# Altium PCB MotorDriver.PcbDoc
Units mil, origin at the board's own origin, x right, y up, seen from the top; angles counter-clockwise.
Board outline 5390 x 3535 mil, 2 copper layers (Top Layer, Bottom Layer); 60 components, 42 nets, 198 pads, 54 vias.
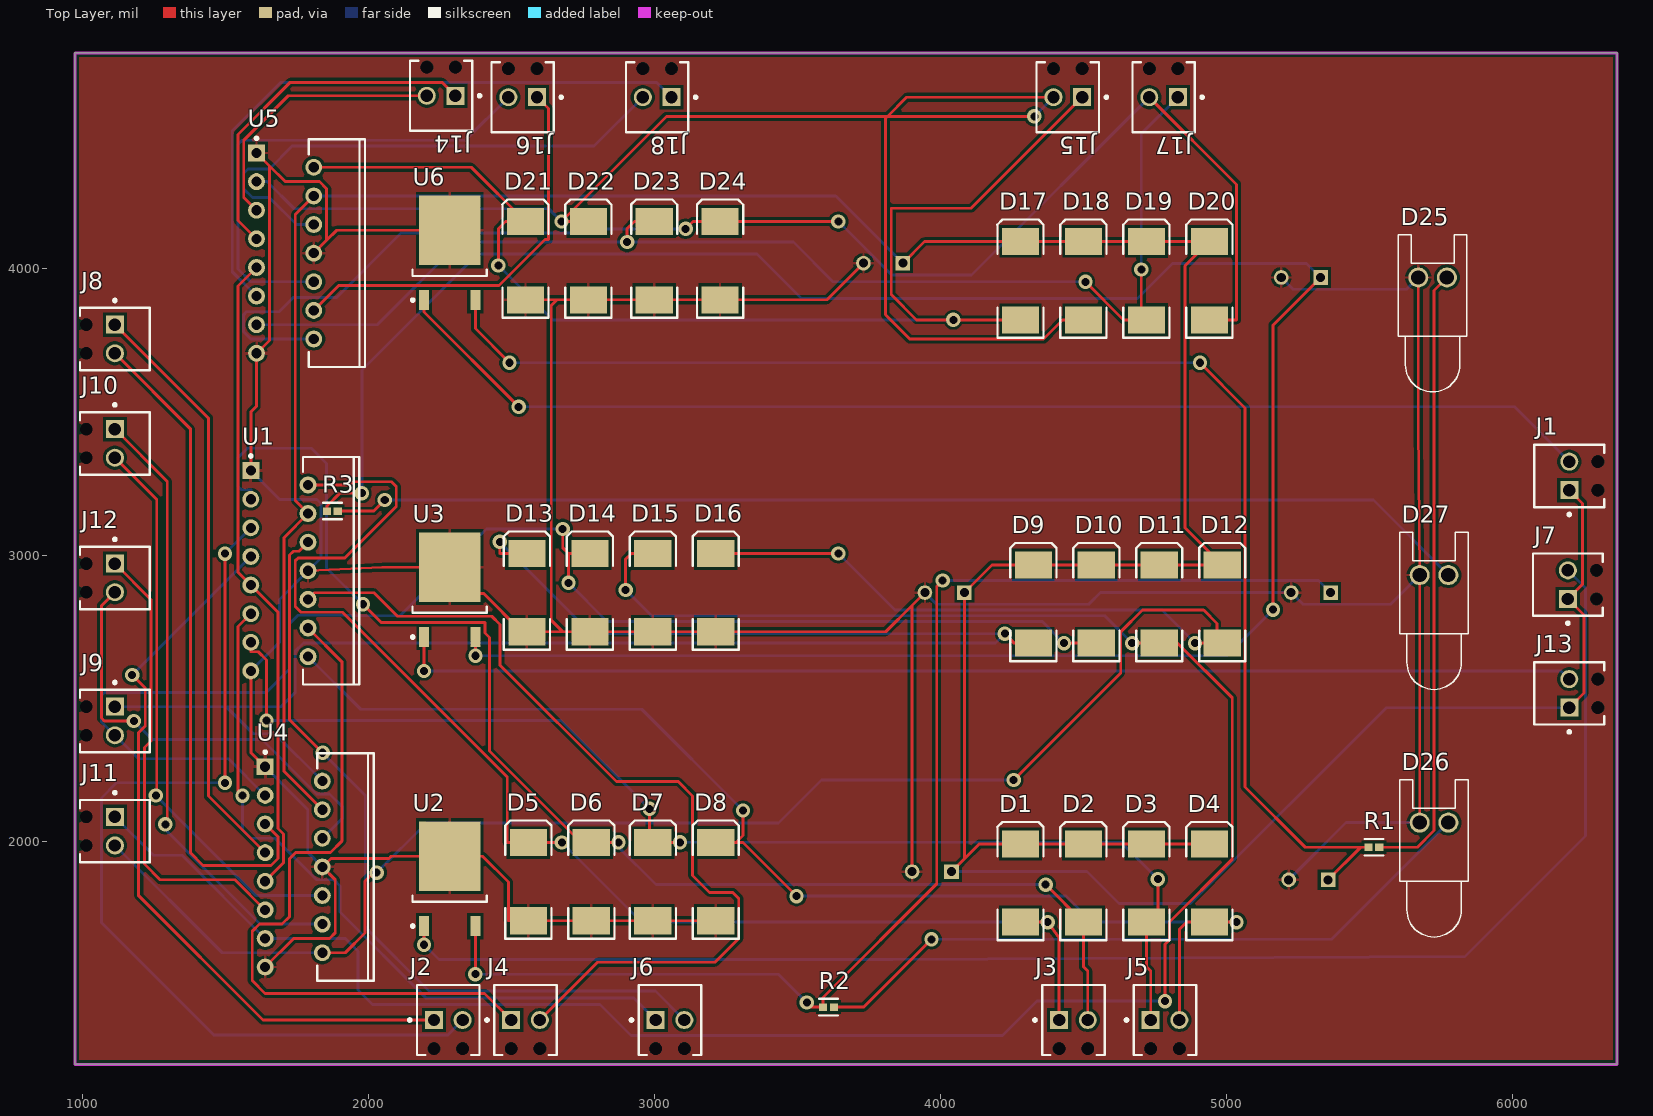
[diagram p0: Top Layer view]
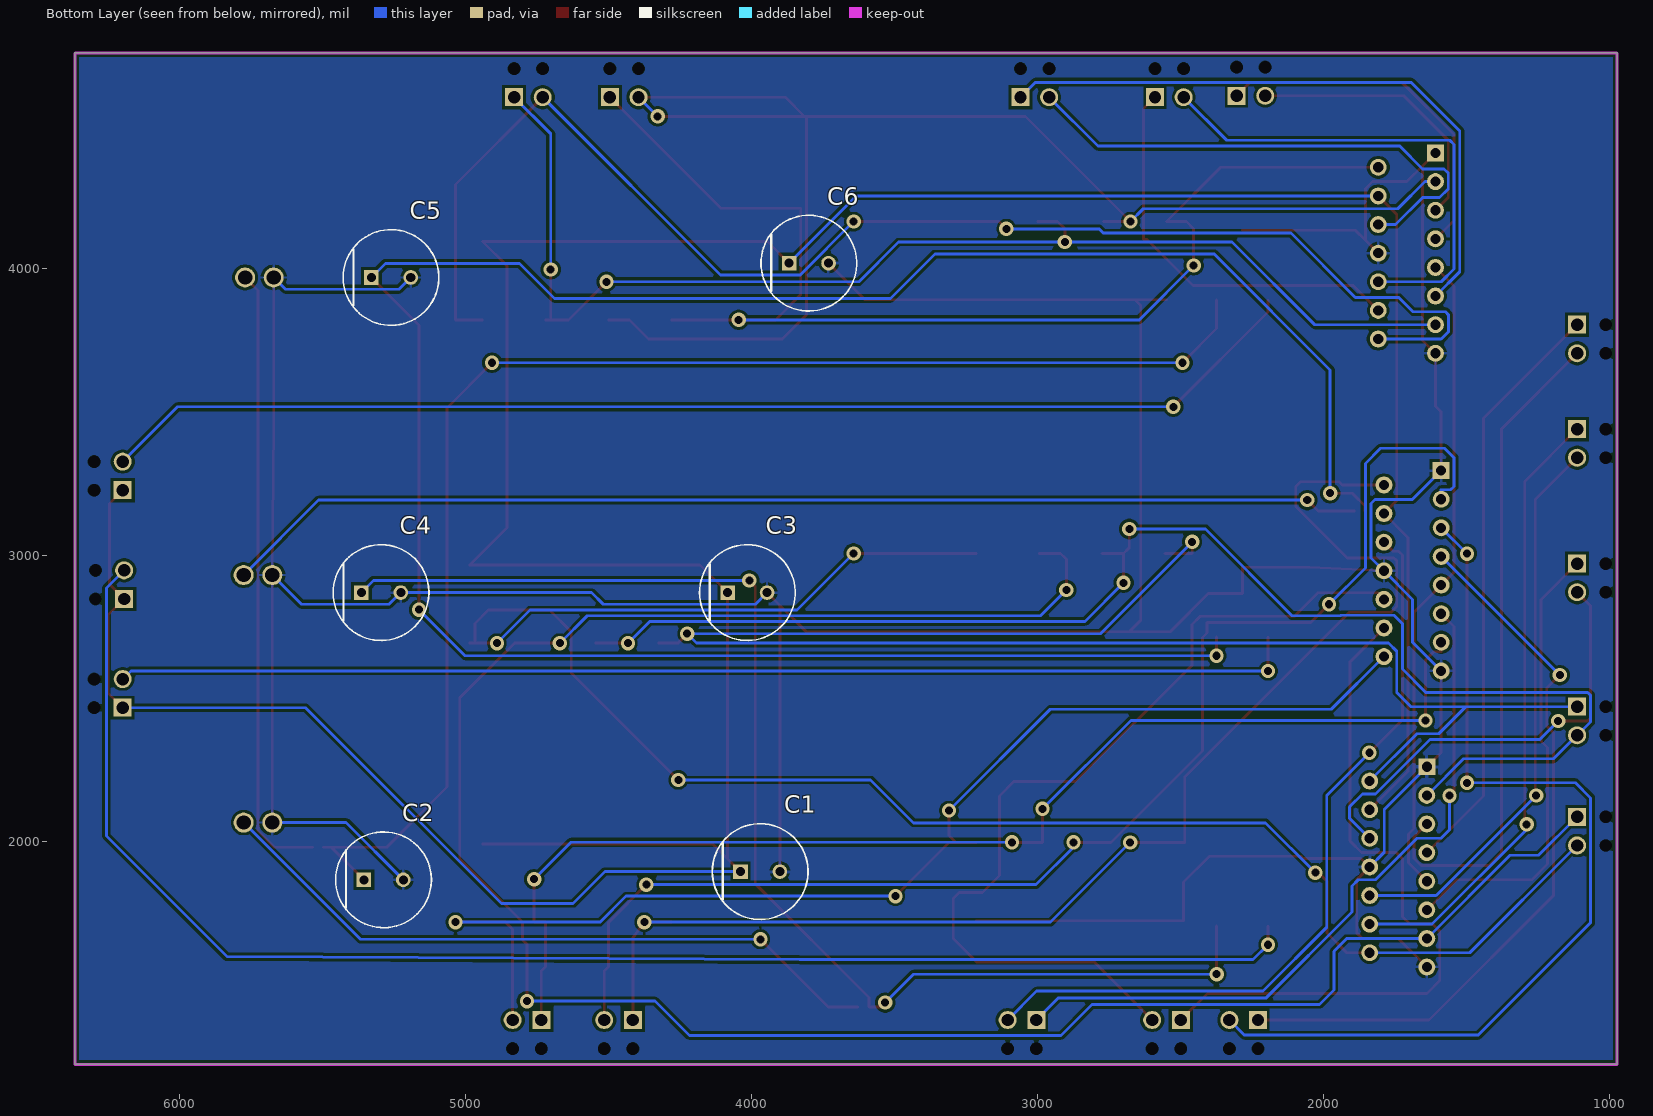
[diagram p1: Bottom Layer view, seen from below]
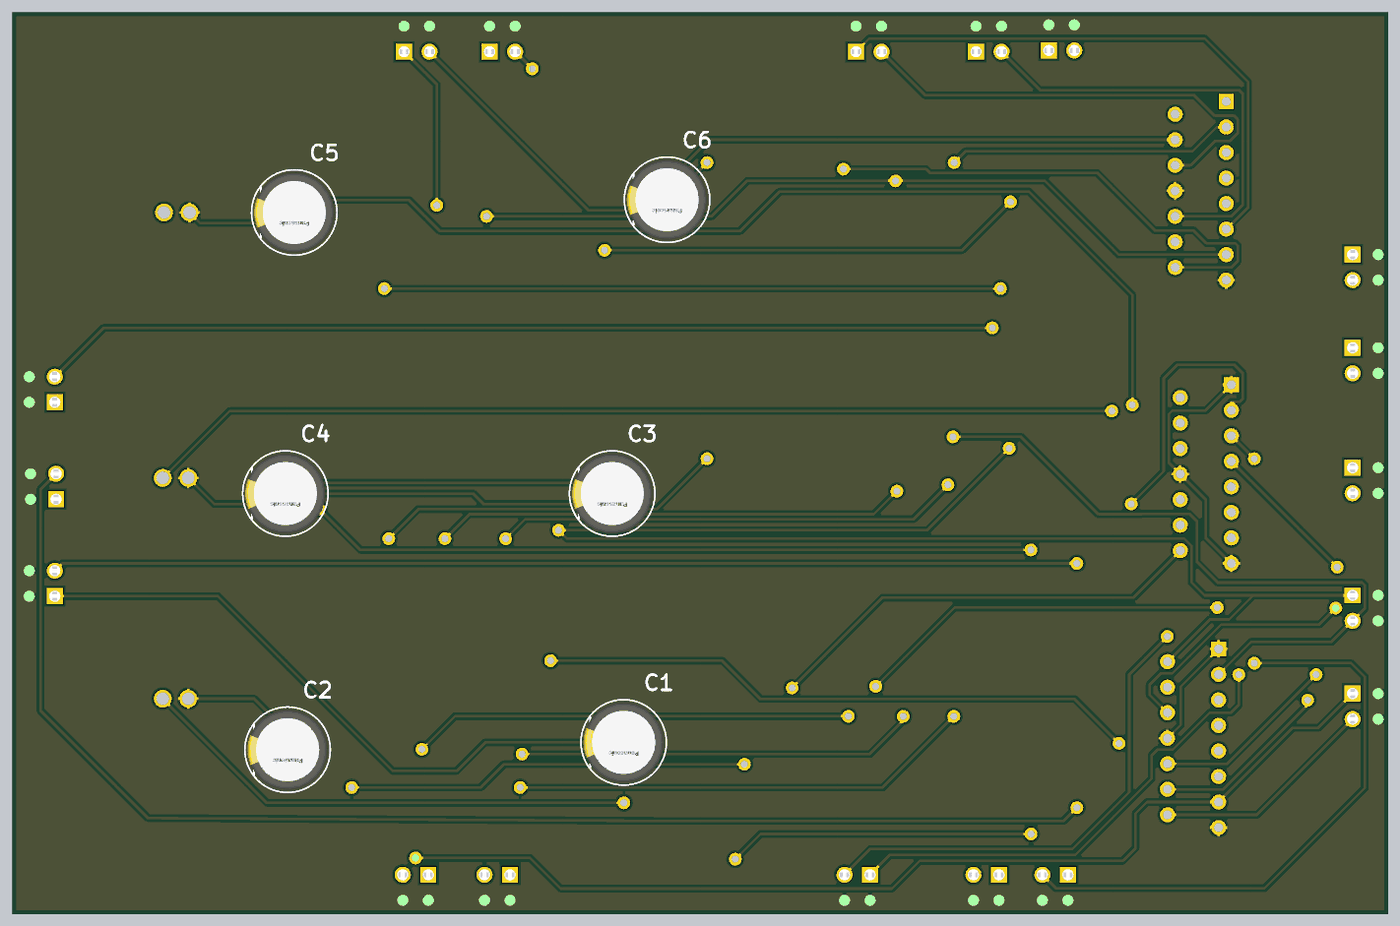
[diagram p2: 3D render of the assembled board from below, using the file's embedded part models]

## Layer stack, top to bottom
Top Solder: solder mask 0.4, Solder Resist, Dk 3.5
Top Layer: signal copper 1.4
Dielectric 1: dielectric 12.6, FR-4, Dk 4.8
Bottom Layer: signal copper 1.4
Bottom Solder: solder mask 0.4, Solder Resist, Dk 3.5

## Board outline
975,1220 975,4755 6365,4755 6365,1220

## Design rules (kind name [scope] priority, off if disabled: settings)
Clearance [All] p1: gap=10 ignorepadtopadclearanceinfootprint=FALSE except(5: Track-Track Track-SMDPad SMDPad-SMDPad; 7: Track-Via)
HoleSize [All] p1: absolutevalues=TRUE maxlimit=150 minlimit=10 maxpercent=80.000 minpercent=20.000
MinimumAnnularRing [All] p1: minimumring=7
MinimumSolderMaskSliver [All] p1: minsoldermaskwidth=1
PolygonConnect [All] p1: connectstyle=Relief reliefconductorwidth=10 reliefentries=4 polygonreliefangle="90 Angle" airgapwidth=10
RoutingVias [All] p1: holewidth=10 width=22 viastyle="Through Hole" minholewidth=10 minwidth=22 maxholewidth=100 maxwidth=150
SilkToSolderMaskClearance [IsPad] p1: minsilkscreentomaskgap=5 clearancetoexposedcopper=TRUE
SolderMaskExpansion [All] p1: expansion=4 istentingtop=FALSE
Width [All] p1: maxlimit=150 minlimit=8 preferedwidth=10
27 further rules are at their usual default settings.

## Components (designator, comment, footprint, x,y, rotation, side; value= is the part's Value field where it differs from the comment)
C1 "EEU-FC1V221L" FP-EEU-FC1V221L-MFG 3969.84,1893.74 r180 bottom value=220uF
C2 "EEU-FC1V221L" FP-EEU-FC1V221L-MFG 5286.1,1865 r180 bottom value=220uF
C3 "EEU-FC1V221L" FP-EEU-FC1V221L-MFG 4014.84,2868.74 r180 bottom value=220uF
C4 "EEU-FC1V221L" FP-EEU-FC1V221L-MFG 5294.84,2868.74 r180 bottom value=220uF
C5 "EEU-FC1V221L" FP-EEU-FC1V221L-MFG 5260,3970 r180 bottom value=220uF
C6 "EEU-FC1V221L" FP-EEU-FC1V221L-MFG 3800,4020 r180 bottom value=220uF
D1 "Diode" SMC 4279.84,1853.74 r90 top
D2 "Diode" SMC 4499.84,1853.74 r90 top
D3 "Diode" SMC 4719.84,1853.74 r90 top
D4 "Diode" SMC 4939.84,1853.74 r90 top
D5 "Diode" SMC 2559.84,1858.74 r90 top
D6 "Diode" SMC 2779.84,1858.74 r90 top
D7 "Diode" SMC 2994.84,1858.74 r90 top
D8 "Diode" SMC 3214.84,1858.74 r90 top
D9 "Diode" SMC 4324.84,2828.74 r90 top
D10 "Diode" SMC 4544.84,2828.74 r90 top
D11 "Diode" SMC 4764.84,2828.74 r90 top
D12 "Diode" SMC 4984.84,2828.74 r90 top
D13 "Diode" SMC 2554.84,2868.74 r90 top
D14 "Diode" SMC 2774.84,2868.74 r90 top
D15 "Diode" SMC 2994.84,2868.74 r90 top
D16 "Diode" SMC 3214.84,2868.74 r90 top
D17 "Diode" SMC 4279.84,3958.74 r90 top
D18 "Diode" SMC 4499.84,3958.74 r90 top
D19 "Diode" SMC 4719.84,3958.74 r90 top
D20 "Diode" SMC 4939.84,3958.74 r90 top
D21 "Diode" SMC 2549.84,4028.74 r90 top
D22 "Diode" SMC 2769.84,4028.74 r90 top
D23 "Diode" SMC 2999.84,4028.74 r90 top
D24 "Diode" SMC 3229.84,4028.74 r90 top
D25 "LED0" LED-0 5720,3970 r0 top
D26 "LED0" LED-0 5725,2065 r0 top
D27 "LED0" LED-0 5725,2930 r0 top
J1 "1725656" PHOE-1725656-2 6197.77,3276.47 r90 top
J2 "1725656" PHOE-1725656-2 2280,1375 r0 top
J3 "1725656" PHOE-1725656-2 4465,1375 r0 top
J4 "1725656" PHOE-1725656-2 2550,1375 r0 top
J5 "1725656" PHOE-1725656-2 4785,1375 r0 top
J6 "1725656" PHOE-1725656-2 3055,1375 r0 top
J7 "1725656" PHOE-1725656-2 6192.77,2896.47 r90 top
J8 "1725656" PHOE-1725656-2 1115,3755 r270 top
J9 "1725656" PHOE-1725656-2 1115,2420 r270 top
J10 "1725656" PHOE-1725656-2 1115,3390 r270 top
J11 "1725656" PHOE-1725656-2 1115,2035 r270 top
J12 "1725656" PHOE-1725656-2 1115,2920 r270 top
J13 "1725656" PHOE-1725656-2 6197.77,2516.47 r90 top
J14 "1725656" PHOE-1725656-2 2255,4605 r180 top
J15 "1725656" PHOE-1725656-2 4445,4600 r180 top
J16 "1725656" PHOE-1725656-2 2540,4600 r180 top
J17 "1725656" PHOE-1725656-2 4780,4600 r180 top
J18 "1725656" PHOE-1725656-2 3010,4600 r180 top
R1 "RC1005F102CS" FP-RC1005-IPC_A 5514.84,1978.74 r0 top
R2 "RC1005F102CS" FP-RC1005-IPC_A 3608.84,1420 r0 top
R3 "RC1005F102CS" FP-RC1005-IPC_A 1874.84,3153.74 r0 top
U1 "L298N" STM-FM-15 1690,2945 r0 top
U2 "L78M05CDT-TR" TO-252_L 2284.84,1868.74 r90 top
U3 "L78M05CDT-TR" TO-252_L 2284.84,2878.74 r90 top
U4 "L298N" STM-FM-15 1740,1910 r0 top
U5 "L298N" STM-FM-15 1710,4055 r0 top
U6 "L78M05CDT-TR" TO-252_L 2285,4056.26 r90 top

## Footprints (in the part's own frame and the unit in brackets; to place one, negate y for a bottom-side part, rotate by r counter-clockwise, add the part's x,y. Pads: shape width x height; smd on the part's side, far side on the other; paste and mask are expansions set on the pad)
FP-EEU-FC1V221L-MFG [mm]
  rect 1.3x1.3 hole 0.8 paste-2539.97 mask+0: 1(-1.75,0)
  round 1.3 hole 0.8 paste-2539.97 mask+0: 2(1.75,0)
  silkscreen extent -4.25,-4.25 4.25,4.25, body extent -4,-4 4,4, height 16.5
FP-RC1005-IPC_A [mil]
  rect 28.16x26.48 smd paste+0 mask+0: 1(-18.84,0) 2(18.84,0)
  silkscreen extent -33,-29 33,29, body extent -41,-21 41,21, height 10
LED-0 [mil] "LED; 2 Leads"
  round 70 hole 50: 1(50,0) 2(-50,0)
  silkscreen extent -120,-400 120,150
PHOE-1725656-2 [mm] "Connector, 2-Leads, Body 6.2x5.4mm, Pitch 2.54mm"
  rect 1.6x1.6 hole 1.1: 1(-1.27,0)
  round 1.6 hole 1.1: 2(1.27,0)
  round 0 hole 1.1 unplated: MH1(-1.27,-2.54) MH2(1.27,-2.54)
  silkscreen extent -3.54,-3.1 2.77,3.1, body extent -2.77,-3.1 2.77,3.1, height 9
SMC [mm] "DO-214-AB/SMC; 2 C-Bend Leads; Body 7.9 x 5.9 mm, inc. leads (LxW)"
  rect 2.4x3.3 smd: 1(-3.475,0) 2(3.475,0)
  silkscreen extent -5.07,-2.05 5.42,2.05
STM-FM-15 [mm] "FM, 15-Leads, Body 20.2x5mm, Pitch 1.27mm"
  rect 1.5x1.5 hole 0.9: 1(-2.54,8.89)
  round 1.5 hole 0.9: 2(2.54,7.62) 3(-2.54,6.35) 4(2.54,5.08) 5(-2.54,3.81) 6(2.54,2.54) 7(-2.54,1.27) 8(2.54,0) 9(-2.54,-1.27) 10(2.54,-2.54) 11(-2.54,-3.81) 12(2.54,-5.08) 13(-2.54,-6.35) 14(2.54,-7.62) 15(-2.54,-8.89)
  silkscreen extent -2.66,-10.1 7.09,10.31, body extent -2.8,-10.1 7.09,10.1, height 21
TO-252_L [mm] "D-PAK, 4-Leads, Body 6.1x6.5mm, Pitch 2.28mm, Lead Span 9.7mm, IPC High Density"
  rect 1.8x0.9 smd: 1(-4.2,2.28) 3(-4.2,-2.28)
  rect 6.2x5.45 smd: 4(2,0)
  silkscreen extent -4.32,-3.3 -1.5,3.4, body extent -2.05,-3.3 4.15,3.3, height 2.4

## Part data
C1 C2 C3 C4 C5 C6: library part CMP-05427-000010-1, "CAP ALUM 220UF 20% 35V RADIAL", Capacitance=220uF, Leakage Current=77uA, Manufacturer="Panasonic Electronic Components", Package=0, Ripple Current=730mA, Temperature="-55°C to +105°C", Temperature Range High=+105°C, Temperature Range Low=-55°C, Tolerance=20%, Voltage Rating=35V, Automotive=Yes, Automotive Grade="Grade 2", Category=Cap, ComponentLink2Description=Datasheet, ComponentLink2URL=https://industrial.panasonic.com/cdbs/www-data/pdf/RDF0000/ABA0000C1209.pdf, Device Class L1="Passive Components", Device Class L2=Capacitors, Device Class L3="Aluminum Electrolytic Capacitors", Digikey Description="CAP ALUM 220UF 20% 35V RADIAL", Dissipation Factor=12%, Esr=0.085Ω, Height=16.5mm, Lead Free=Yes, Life=2000Hours, Manufacturer Part Number=EEU-FC1V221L, Material=Aluminum, Mouser Description="Capacitor; Aluminum Electrolytic; Fc Radial Elec Cap 220uF 35V", Octopart=https://octopart.com/eeu-fc1v221l-panasonic-39478519, RoHS=TRUE
D1 D2 D3 D4 D5 D6 D7 D8 D9 D10 D11 D12 D13 D14 D15 D16 D17 D18 D19 D20 D21 D22 D23 D24: "Default Diode", Code_JEDEC=DO-214-AB, LatestRevisionDate=17-Jul-2002, LatestRevisionNote="Re-released for DXP Platform.", PackageDescription="DO-214-AB/SMC; 2 C-Bend Leads; Body 7.9 x 5.9 mm, inc. leads (LxW)", PackageReference=SMC, PackageVersion=Sep-1996, Published=8-Jun-2000, Publisher="Altium Limited"
D25 D26 D27: "Typical INFRARED GaAs LED", LatestRevisionDate=08-Jul-2005, LatestRevisionNote="Mech Layer 1 removed.", PackageDescription="LED; 2 Leads", PackageReference=LED-0, Published=8-Jun-2000, Publisher="Altium Limited"
J1 J2 J3 J4 J5 J6 J7 J8 J9 J10 J11 J12 J13 J14 J15 J16 J17 J18: library part CMP-2000-05299-1, "Male Header, Pitch 2.54 mm, 1 x 2 Position, Height 9 mm, Tail Length 3.5 mm", Colour=Green, Manufacturer="Phoenix Contact", Content=250pc(s), Datasheet URL=http://datasheet.octopart.com/1725656-Phoenix-Contact-datasheet-5302866.pdf, Datasheet Version=Apr-08, Industrial packaging=Yes, Manufacturer part No.=1725656, Manufacturer URL=http://www.phoenixcontact.com/, Number of contacts=2, Pitch=2.54mm, Type=MPT0,5/2-2,54
R1 R2 R3: library part CMP-13261-004451-1, "Res Thick Film 0402 1kΩ 1% 0.063W ±100ppm/°C Molded SMD T/R", Case Code (Imperial)=0402, Case Code (Metric)=1005, Max Operating Temperature=155°C, Max Power Dissipation=63mW, Min Operating Temperature=-55°C, Resistance=1kR, Temperature Coefficient=100ppm/°C, Tolerance=1%, Voltage Rating (DC)=50V, Case/Package=0402, Composition="Thick Film", Contact Plating=Tin, Depth=0.5mm, Features="Moisture Resistant", Height=0.016inch, Lead Free="Lead Free", Length=1mm, Military Standard=Not, Number of Terminations=2, Packaging="Tape and Reel", Radiation Hardening=No, Width=0.02inch
U1 U4 U5: library part CMP-2000-06526-1, "Dual Full-Bridge Driver, 4.8 to 46 V, -40 to 150 degC, 15-Pin FM (MW 15L), RoHS, Tube", Driver Case Style=Multiwatt, Manufacturer=STMicroelectronics, Operating Temperature Max=130°C, Operating Temperature Min=-25°C, Output Current=2A, Output Voltage=46V, Package Description="15-Pin Flange Mount, Body 5 x 19.6 mm, Pitch 1.27 mm", Package Reference=FM-15, PartNumber=L298, Supply Voltage Max=7V, Supply Voltage Min=4.5V, Automotive Qualification Standard=-, Datasheet URL=https://datasheet.ciiva.com/15109/getdatasheetpartid-50682-15109332.pdf, Datasheet Version=01/2000, Manufacturer URL=http://www.st.com/, Motor Type=FullBridge, Mounting Technology=ThroughHole, MSL=-, No. of Outputs=4Outputs, No. of Pins=15Pins, Packaging=Each, Product Range=-, SVHC=NoSVHC(17-Dec-2015)
U2 U3 U6: library part CMP-0244-00178-1, "Positive Voltage Regulator, 5V, 3-Pin DPAK, Tape and Reel", ComponentLink1Description="Manufacturer URL", ComponentLink1URL=http://www.st.com, ComponentLink2Description=Datasheet, ComponentLink2URL=http://www.st.com/internet/com/TECHNICAL_RESOURCES/TECHNICAL_LITERATURE/DATASHEET/CD00000447.pdf, DatasheetVersion=1/11/2010, PackageDescription="3-Pin Transistor Outline Package 2.28 mm Pitch, 9.7 mm Lead Span (DPAK)", PackageReference=TO-252, PackageVersion=2011

## Via types
v1: diameter 50, hole 28, Top Layer to Bottom Layer, 54 vias

## Nets (pads, with @x,y where several pads share a name; then routed paths per layer and width w, separated by ;. In a path a pad name is that pad's centre, name@x,y a point inside that pad or via, vN(x,y) a via of type N, cw(c..) or ccw(c..) an arc to the next point about the centre after c; other vN are vias at no path point)
+5: U1.9 U4.9 U5.9 | length 2264.7
  Top Layer w10: U5.9 1545,3940 1545,2940 U1.9 1685,2800 1685,2044.06 1704.53,2024.53 1704.53,1924.53 U4.9
GND: C1.2 C2.2 C3.2 C4.2 C5.2 C6.2 D5.1 D6.1 D7.1 D8.1 D13.1 D14.1 D15.1 D16.1 D21.1 D22.1 D23.1 D24.1 D25.2 D26.2 D27.2 U1.1 U1.8 U1.15 U2.4 U3.4 U4.1 U4.8 U4.15 U5.1 U5.8 U5.15 U6.4 | length 16441.2
  Top Layer w10: U1.15 1590,2310 U4.1 ; U1.1 1590,3500 1610,3520 U5.15 1655,3750 1655,4360 ; U5.1 1655,4360 ; U4.15 1740,1660 1865,1660 1885,1680 1885,1865 U4.8 1869.93,1939.93 2072.93,1939.93 2080.48,1947.48 U2.4 2400,1947.48 2490,1857.48 2490,1721.93 D5.1 D6.1 D7.1 D8.1 ; U1.8 2049.48,2957.48 U3.4 2284.84,2865 2403.93,2865 2537,2731.93 D13.1 2680,2731.93 ; U5.8 1855,4100 ; U6.4 1890,4135 1855,4100 ; D21.1 2660,3891.93 ; C6.2 3603.03,3891.93 D24.1 D23.1 D22.1 2660,3891.93 ; C1.2 3900.94,2823.74 ; C3.2 3900.94,2823.74 ; D25.2 5670,3455 D27.2 D26.2 ; 1655,4360 1710,4305 1830,4305 1855,4280 1855,4100 ; 2660,3891.93 2640,3871.93 2640,2771.93 2680,2731.93 ; 2680,2731.93 D14.1 D15.1 D16.1 3809.13,2731.93 3900.94,2823.74
  Bottom Layer w10: U1.15 1690,2695 1690,2845 U1.8 1835,2990 1835,3180 1821,3194 1691,3194 U1.1 ; U4.1 1789,2111 1789,1961 U4.8 ; C3.2 3986.68,2828 4518.5,2828 4559.24,2868.74 C4.2 5266.68,2828 5573,2828 D27.2 ; C5.2 5232.1,3929 5629,3929 D25.2 ; C2.2 5417.2,2065 D26.2
NetC2_1: C2.1 R1.1 U6.3 | length 4908.8
  Top Layer w10: U6.3 2374.76,3791.24 v1(2494,3672) ; v1(4907,3672) 5065,3514 5065,2188.74 5275,1978.74 5468.74,1978.74 ; C2.1 5468.74,1978.74 ; R1.1 5468.74,1978.74
  Bottom Layer w10: v1(2494,3672) v1(4907,3672)
NetC4_1: C4.1 R2.1 U2.3 | length 4468.8
  Top Layer w10: v1(2374.61,1535) U2.3 ; v1(3533,1436) 3549,1420 R2.1 3590,1454 3987,1851 3987,2890 v1(4008,2911)
  Bottom Layer w10: v1(2374.61,1535) 3434,1535 v1(3533,1436) ; v1(4008,2911) 5321.48,2911 C4.1
NetC5_1: C5.1 R3.1 U3.3 | length 8392
  Top Layer w10: R3.1 1856,3171 1901,3216 v1(1978,3216) ; U3.3 2374.61,2648.39 v1(2375,2648) ; v1(5162,2809) 5162,3803.1 C5.1
  Bottom Layer w10: v1(1978,3216) 1978,3647 2383,4052 3359,4052 3514,3897 4689,3897 4811,4019 5279.9,4019 C5.1 ; v1(2375,2648) 5001,2648 v1(5162,2809)
NetD1_1: D1.1 D5.2 J3.1 U1.2 | length 4651
  Top Layer w10: U1.2 1936.04,3245 1947.21,3256.18 2081.82,3256.18 2098,3240 2098,3170 1918,2990 1755.47,2990 1745.47,2980 1745.47,2820 1765.47,2800 1910,2800 2485.9,2224.1 2485.9,1995.55 D5.2 v1(2677,1995.55) ; D1.1 v1@4374.93,1716.93 ; v1(4375,1717) v1@4374.93,1716.93 ; J3.1 4415,1661.93 v1@4374.93,1716.93
  Bottom Layer w10: v1(2677,1995.55) 2955.55,1717 v1(4375,1717)
NetD2_1: D2.1 D6.2 J3.2 U1.3 | length 4663.1
  Top Layer w10: v1(1982,2828) 2046,2764 2408,2764 2408,2728 2424,2712 2424,2315.55 2744,1995.55 D6.2 2874.55,1995.55 v1(2875,1996) ; v1(4367.93,1848) 4499,1716.93 D2.1 4499.84,1561.16 4515,1546 J3.2
  Bottom Layer w10: U1.3 1590,3228 1557,3228 1545,3240 1545,3340 1578,3373 1802,3373 1855,3320 1855,2955 v1(1982,2828) ; v1(2875,1996) 2875,1979 3006,1848 v1(4367.93,1848)
NetD3_1: D3.1 D7.2 J5.1 U1.13 | length 4263.5
  Top Layer w10: U1.13 1590,2662 1616,2662 1645,2633 v1(1645,2422) ; v1(2983,2113) 2983,1995.55 D7.2 3089.55,1995.55 v1(3090,1996) ; J5.1 4735,1546 4719.84,1561.16 D3.1 4760,1716.93 v1(4760,1867)
  Bottom Layer w10: v1(1645,2422) 2674,2422 v1(2983,2113) ; v1(3090,1996) 4631,1996 v1(4760,1867)
NetD4_1: D4.1 D8.2 J5.2 U1.14 | length 4327.3
  Top Layer w10: D8.2 3285.55,1995.55 ; v1(3310,2107) 3310,2020 3285.55,1995.55 ; v1(3497.1,1808) 3309.55,1995.55 3285.55,1995.55 ; J5.2 4835,1691.93 4860,1716.93 D4.1 v1(5035,1716.93)
  Bottom Layer w10: U1.14 1974,2461 2956,2461 v1(3310,2107) ; v1(3497.1,1808) 4439,1808 4530.07,1716.93 v1(5035,1716.93)
NetD9_1: D9.1 D13.2 J9.1 U4.2 | length 5890.1
  Top Layer w10: v1(2460,3046) 2460,3006 2460.45,3005.55 D13.2 ; v1(4225,2725) 4258.07,2691.93 D9.1
  Bottom Layer w10: J9.1 1503.8,2470 ; U4.2 1674.49,2375.51 1598.28,2375.51 1503.8,2470 ; v1(2460,3046) 2781,2725 v1(4225,2725) 4192,2692 1774.03,2692 1745.47,2663.44 1745.47,2520 1695.47,2470 1503.8,2470
NetD10_1: D10.1 D14.2 J9.2 U4.3 | length 4921.6
  Top Layer w10: v1(2680,3091) 2680,3025.55 2700,3005.55 ; v1(2700,2903) 2700,3005.55 ; D14.2 2700,3005.55 ; v1(4432.07,2691.93) D10.1
  Bottom Layer w10: U4.3 1512,2288 1197,2288 J9.2 1068,2417 1068,2510 1078,2520 1644,2520 1725.47,2601.47 1725.47,2760 1755,2789.53 1940.47,2789.53 1942,2788 2111,2788 2414,3091 v1(2680,3091) ; v1(2700,2903) 2835,2768 4356,2768 v1(4432.07,2691.93)
NetD11_1: D11.1 D15.2 J11.1 U4.13 | length 7759.4
  Top Layer w10: v1(2900,2878) 2900,2985.55 2920,3005.55 D15.2 ; v1(4670,2692) 4670.07,2691.93 D11.1 4829,2691.93 5020,2500.93 5020,1937 4800,1717 4800,1655 4785,1640 v1(4785,1441)
  Bottom Layer w10: J11.1 1249.32,1950.68 1349.32,1950.68 U4.13 1920,1660 1965,1615 1965,1480 2015.5,1429.5 2810.5,1429.5 2919,1321 4217,1321 4337,1441 v1(4785,1441) ; v1(2900,2878) 2990,2788 4574,2788 v1(4670,2692)
NetD12_1: D12.1 D16.2 J11.2 U4.14 | length 6682.4
  Top Layer w10: U4.14 1920,1610 1989,1679 1989,1860 2019,1890 v1(2030,1890) ; D16.2 v1(3643.45,3005.55) ; v1(4256,2214) 4630,2588 4630,2732 4706,2808 4920,2808 4967,2761 D12.1@4967,2691.93 ; v1(4890,2692) 4890.07,2691.93 D12.1@4967,2691.93 ; D12.1 D12.1@4967,2691.93
  Bottom Layer w10: J11.2 1490,1610 U4.14 ; v1(2030,1890) 2204,2064 3434,2064 3584,2214 v1(4256,2214) ; v1(3643.45,3005.55) 3841,2808 4774,2808 v1(4890,2692)
NetD17_1: D17.1 D21.2 J15.1 U5.2 | length 4337.5
  Top Layer w10: U5.2 2360.39,4355 D21.2 2480,4165.55 2455,4140.55 v1(2455,4012) ; D17.1 v1(4045.07,3821.93) 3916.07,3821.93 3828,3910 3828,4211 4108,4213 J15.1
  Bottom Layer w10: v1(2455,4012) 2645.07,3821.93 v1(4045.07,3821.93)
NetD18_1: D18.1 D22.2 J15.2 U5.3 | length 5175.5
  Top Layer w10: D22.2 v1(2675.45,4165.55) 3042.9,4533 3815,4533 ; v1(4328,4533) 3815,4533 ; J15.2 3882,4600 3815,4533 ; D18.1 4426.93,3821.93 4360,3755 3893,3755 3808,3840 3808,4526 3815,4533
  Bottom Layer w10: U5.3 1646.89,4305 1741.89,4210 2631,4210 v1(2675.45,4165.55) ; v1(4328,4533) J15.2
NetD19_1: D19.1 D23.2 J17.1 U5.13 | length 4324.8
  Top Layer w10: v1(2905,4094) 2905,4140 2930.55,4165.55 D23.2 ; v1(4506.93,3955) 4640,3821.93 D19.1@4702,3821.93 ; v1(4702,3998) D19.1@4702,3821.93 ; D19.1 D19.1@4702,3821.93
  Bottom Layer w10: U5.13 2032,3805 2321,4094 v1(2905,4094) 3486,4094 3625,3955 v1(4506.93,3955) ; v1(4702,3998) 4702,4472 J17.1
NetD20_1: D20.1 D24.2 J17.2 U5.14 | length 4949.2
  Top Layer w10: v1(3109.45,4140) 3135,4165.55 D24.2 v1(3643.45,4165.55) ; J17.2 5035,4295 5035,3822.13 5034.8,3821.93 D20.1
  Bottom Layer w10: U5.14 1590,3755 1565,3780 1565,3840 1575,3850 1688,3850 1738,3900 1890,3900 2115,4125 2771,4125 2786,4140 v1(3109.45,4140) ; v1(3643.45,4165.55) 3830,3979 4109,3979 J17.2
NetD25_1: D25.1 R1.2 | length 2167.1
  Top Layer w10: R1.2 5666.74,1978.74 5725,2037 5725,3925 D25.1
NetD26_1: D26.1 R2.2 | length 2414.5
  Top Layer w10: R2.2 3732,1420 v1(3969,1657)
  Bottom Layer w10: v1(3969,1657) 5367,1657 D26.1
NetD27_1: D27.1 R3.2 | length 4005.7
  Top Layer w10: R3.2 2019.74,3153.74 v1(2058,3192)
  Bottom Layer w10: v1(2058,3192) 5513,3192 D27.1
NetJ1_2: J1.2 U6.1 | length 4260.9
  Top Layer w10: U6.1 2195.24,3848.89 v1(2526.13,3518)
  Bottom Layer w10: v1(2526.13,3518) 6006.24,3518 J1.2
NetJ2_1: J2.1 U1.7 | length 2597.8
  Top Layer w10: v1(1175.5,2580.5) 1221,2535 1221,2403 1198,2380 1198,1809 1632,1375 J2.1
  Bottom Layer w10: v1(1175.5,2580.5) U1.7
NetJ2_2: J2.2 U1.5 | length 3265
  Top Layer w10: v1(1500,2204) v1(1500,3005)
  Bottom Layer w10: v1(1500,2204) 1121,2204 1068,2151 1068,1715 1461,1322 2277,1322 J2.2 ; v1(1500,3005) U1.5
NetJ4_1: J4.1 U1.12 | length 2489.8
  Top Layer w10: U1.12 1908,2627 1908,2000 1868,1960 1747,1960 1724.53,1937.53 1724.53,1735.53 1699,1710 1620,1710 1595,1685 1595,1513 1640,1468 2407,1468 J4.1
NetJ4_2: J4.2 U1.10 | length 3155.9
  Top Layer w10: U1.10 1813.06,2868.06 2019.94,2868.06 2102,2786 2431.77,2786 2461,2756.77 2461,2615 2868,2208 3084,2208 3134,2158 3134,1880 3193,1821 3274,1821 3295,1800 3295,1660 3212,1577 2802,1577 J4.2
NetJ6_1: J6.1 U1.11 | length 2553
  Top Layer w10: v1(1561,2159) 1545,2175 1545,2750 U1.11
  Bottom Layer w10: v1(1561,2159) 1561,2040 1591,2010 1675,2010 1820,1865 1880,1865 1902,1843 1902,1752 2201.5,1452.5 2927.5,1452.5 J6.1
NetJ6_2: J6.2 U1.6 | length 2742.9
  Top Layer w10: U1.6 1758.44,3013.44 1738.92,3013.44 1725.47,3000 1725.47,2424.53 v1(1841,2309)
  Bottom Layer w10: v1(1841,2309) 1990,2160 1990,1699 2213,1476 3004,1476 J6.2
NetJ7_2: J7.2 U2.1 | length 5274.1
  Top Layer w10: v1(2195.08,1638) U2.1
  Bottom Layer w10: v1(2195.08,1638) 2247.13,1585.95 3832.27,1585.95 5833,1597 6254,2018 6254,2885.24 J7.2
NetJ8_1: J8.1 U4.7 | length 2062.5
  Top Layer w10: J8.1 1442,3478 1442,2158 U4.7
NetJ8_2: J8.2 U4.5 | length 2327.2
  Top Layer w10: J8.2 1378.53,3441.47 1378.53,1960 1423.06,1915.47 1660,1915.47 1684.53,1940 1684.53,2015.47 U4.5
NetJ10_1: J10.1 U4.12 | length 2163.8
  Top Layer w10: J10.1 1298,3257 1298,2066 v1(1291,2059)
  Bottom Layer w10: v1(1291,2059) 1291,2041 1622,1710 U4.12
NetJ10_2: J10.2 U4.10 | length 1969
  Top Layer w10: J10.2 1261,3194 1261,2162.48 v1(1258,2159.48)
  Bottom Layer w10: v1(1258,2159.48) 1607.48,1810 U4.10
NetJ12_1: J12.1 U4.11 | length 1600
  Top Layer w10: J12.1 1241,2844 1241,2350.63 1218,2327.63 1218,1920 1273,1865 1535,1865 U4.11
NetJ12_2: J12.2 U4.6 | length 1568.9
  Top Layer w10: J12.2 1068,2823 1068,2430 1078,2420 v1(1181,2420)
  Bottom Layer w10: v1(1181,2420) 1245.49,2355.51 1629.49,2355.51 1820,2165 1865,2165 1910,2120 1910,2080 U4.6
NetJ13_2: J13.2 U3.1 | length 4132.9
  Top Layer w10: v1(2195.08,2595) U3.1
  Bottom Layer w10: v1(2195.08,2595) 6169.24,2595 J13.2
NetJ14_1: J14.1 U5.7 | length 1245.8
  Top Layer w10: U5.7 1545.47,4169.53 1545.47,4469.53 1727.94,4652 2258,4652 J14.1
NetJ14_2: J14.2 U5.5 | length 966.9
  Top Layer w10: U5.5 1565.47,4249.53 1565.47,4449.53 1720.94,4605 J14.2
NetJ16_1: J16.1 U5.12 | length 1436.3
  Top Layer w10: U5.12 1897,3942 2457,3942 2618,4103 2630,4103 2630,4560 J16.1
NetJ16_2: J16.2 U5.10 | length 1731.3
  Bottom Layer w10: U5.10 1590,3955 1545.47,3999.53 1545.47,4435 1560,4449.53 2339.53,4449.53 J16.2
NetJ18_1: J18.1 U5.11 | length 2239.2
  Bottom Layer w10: U5.11 1525,3990 1525,4482 1695,4652 3008,4652 J18.1
NetJ18_2: J18.2 U5.6 | length 1855.9
  Bottom Layer w10: U5.6 1749.06,4155 1654.53,4249.53 1595.47,4249.53 1565.47,4279.53 1565.47,4335 1580,4349.53 1655,4349.53 1734.47,4429 2789,4429 J18.2
VCC: C1.1 C3.1 C6.1 D1.2 D2.2 D3.2 D4.2 D9.2 D10.2 D11.2 D12.2 D17.2 D18.2 D19.2 D20.2 J1.1 J7.1 J13.1 U1.4 U4.4 U5.4 | length 12904.8
  Top Layer w10: U5.4 1745,4190 1745,3190 U1.4 1705.47,3060.47 1705.47,2244.53 U4.4 ; C6.1 3944.45,4095.55 D17.2 D18.2 D19.2 D20.2 4855,4010.71 4855,3095.39 D12.2 D11.2 D10.2 D9.2 4180.55,2965.55 C3.1 4083.74,1938.74 ; C1.1 4083.74,1938.74 ; D4.2 D3.2 D2.2 D1.2 4135.55,1990.55 4083.74,1938.74 ; J13.1 6249,2517.7 6249,2790.24 J7.1 6244,2897.7 6244,3180.24 J1.1
  Bottom Layer w10: U5.4 3633.9,4255 C6.1 ; C1.1 4512.26,1893.74 4624,1782 4874,1782 5558.47,2466.47 J13.1
pads on no net: J1.MH1 J1.MH2 J2.MH1 J2.MH2 J3.MH1 J3.MH2 J4.MH1 J4.MH2 J5.MH1 J5.MH2 J6.MH1 J6.MH2 J7.MH1 J7.MH2 J8.MH1 J8.MH2 J9.MH1 J9.MH2 J10.MH1 J10.MH2 J11.MH1 J11.MH2 J12.MH1 J12.MH2 J13.MH1 J13.MH2 J14.MH1 J14.MH2 J15.MH1 J15.MH2 J16.MH1 J16.MH2 J17.MH1 J17.MH2 J18.MH1 J18.MH2

## Polygon pours and split planes (outlines as drawn)
GND on Top Layer "GND_L01_P000" (solid, pour order 0): 6365,4755 6365,1220 975,1220 975,4755
GND on Bottom Layer "GND_L02_P001" (solid, pour order 1): 6365,4755 6365,1220 975,1220 975,4755

## Keep-outs
Top Layer:
  the board outline again, w10
Bottom Layer:
  the board outline again, w10